# Altium PCB PCBA-2121-01.PcbDoc (part 2 of 2)
Units mil, origin at the board's own origin, x right, y up, seen from the top; angles counter-clockwise.
Board outline 748.03 x 2362.2 mil, 4 copper layers (L1, L2, L3, L4), stack 62.192 mil thick; 70 components, 51 nets, 274 pads, 177 vias.
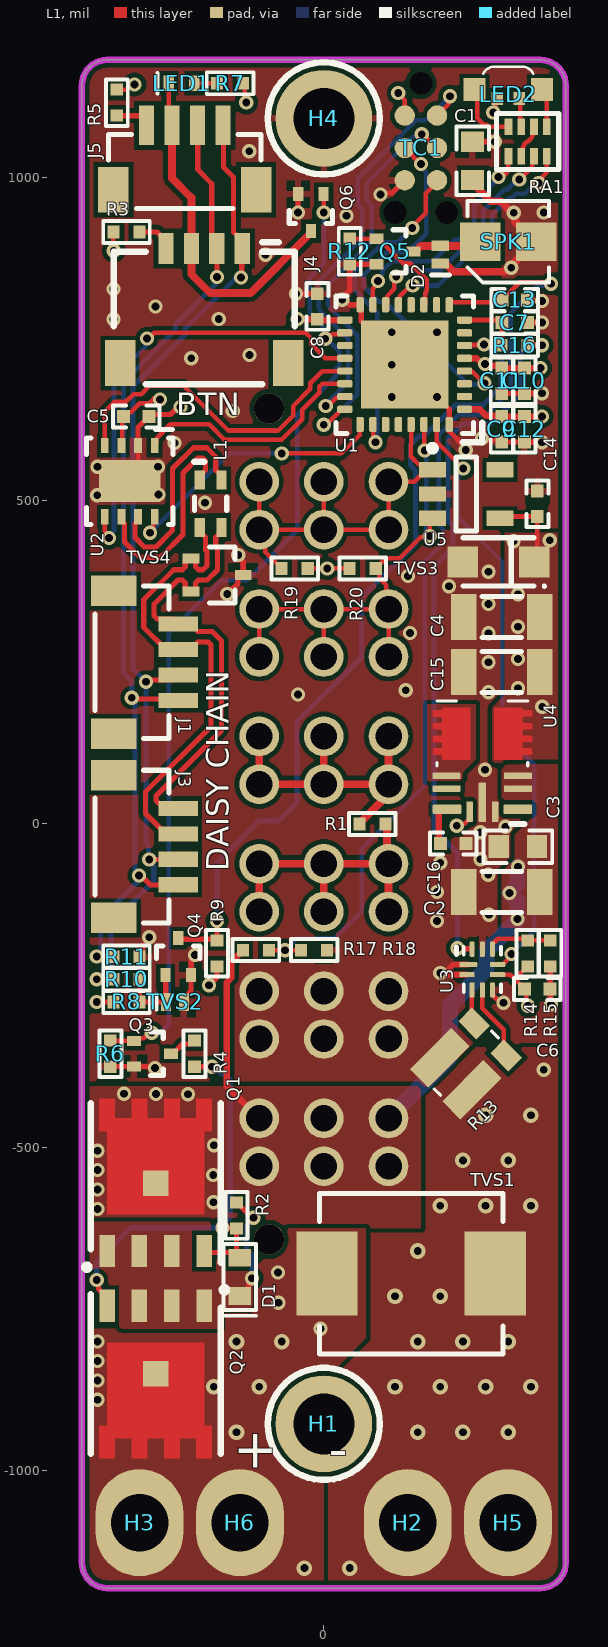
[diagram p0: L1 view]

## Polygon pours and split planes (outlines as drawn) (continued)
GND on L1 "NO_THERMAL" (solid, pour order 29): 214.71,-365 239.71,-340 240,-340 195,-295 195,-216.75 -141.75,-216.75 -145,-220 -145,-405 140,-405 155,-420 160,-420 214.71,-365.29
V- on L1 "NO_THERMAL" (solid, pour order 22): 0,-1181.1 363.9,-1181.1 380,-1165 380,-345 235,-345 175,-405 0,-405
VBAT on L1 "NO_THERMAL" (solid, pour order 20): -375,-615 -365,-625 150,-625 150,-410.12 144.88,-405 -375,-405
NetD1_C on L1 "NO_THERMAL" (solid, pour order 17): -375,-615 -110,-615 -110,-745 -115,-750 -115.98,-749.02 -159.61,-749.02 -159.61,-779.61 -160,-780 -380,-780
V+ on L1 "NO_THERMAL" (solid, pour order 19): -380,-1185 -376.1,-1181.1 0,-1181.1 0,-860 65,-795 65,-625 -85,-625 -85,-665 -160,-740 -160,-780 -380,-780
3V3 on L1 "NO_THERMAL" (solid, pour order 18): 275,960 275,843.69 296.76,843.69 374.02,843.69 374.02,960
VBAT on L4 "NO_THERMAL" (solid, pour order 25): 265,-160 230,-195 230,-215 175,-270 175,-350 110,-415 -130,-415 -130,-592.64 114.92,-592.64 170,-537.56 170,-410 215,-365 215,-291.42 273.54,-232.87 273.54,-202.03 298,-177.58 301.42,-177.58 325,-154 325,-50 265,-50
GND on L4 "GND_L04_P032" (solid, pour order 32): -380,-1185 380,-1185 380,1185 -380,1185
V+ on L4 "NO_THERMAL" (solid, pour order 30): 0,-1181.1 -376.1,-1181.1 -380,-1177.2 -380,-705 -275,-600 95,-600 95,-1135 50,-1180
V- on L4 "NO_THERMAL" (solid, pour order 26): 95,-715 95,-590.13 174.21,-510.57 172.5,-337.5 275,-235 380,-235 380,-1165 363.9,-1181.1 0,-1181.1 0,-810
VBAT on L2 "VBAT_L02_P027" (solid, pour order 27): -379.96,-320 380,-320 380,-1185 -376.1,-1185 -378.05,-1183.05
3V3 on L2 "3V3_L02_P023" (solid, pour order 23): -380,-300 380,-300 380,1160 355,1185 -350,1185 -380,1155
GND on L3 "GND_L03_P024" (solid, pour order 24): -380,-1185 380,-1185 380,1185 -380,1185

## Keep-outs
Keep-Out Layer:
  the board outline again, w10

## Silkscreen, mask and mechanical layers (free items; w line width, h text height)
Top Overlay:
  text "BTN" at -228,632 h35
  text "DAISY CHAIN" at -147,-73 h35 r90
  text "+   -" at -139.95,-995 h60
Bottom Overlay:
  text "HEBI ROBOTICS / PCBA-2121-01 TEST02 / N. PAIVA - 2025-01" at 375,785 h80
Board Outline:
  the board outline again, w10